# EAGLE board capacitors (EAGLE 9.6.2)
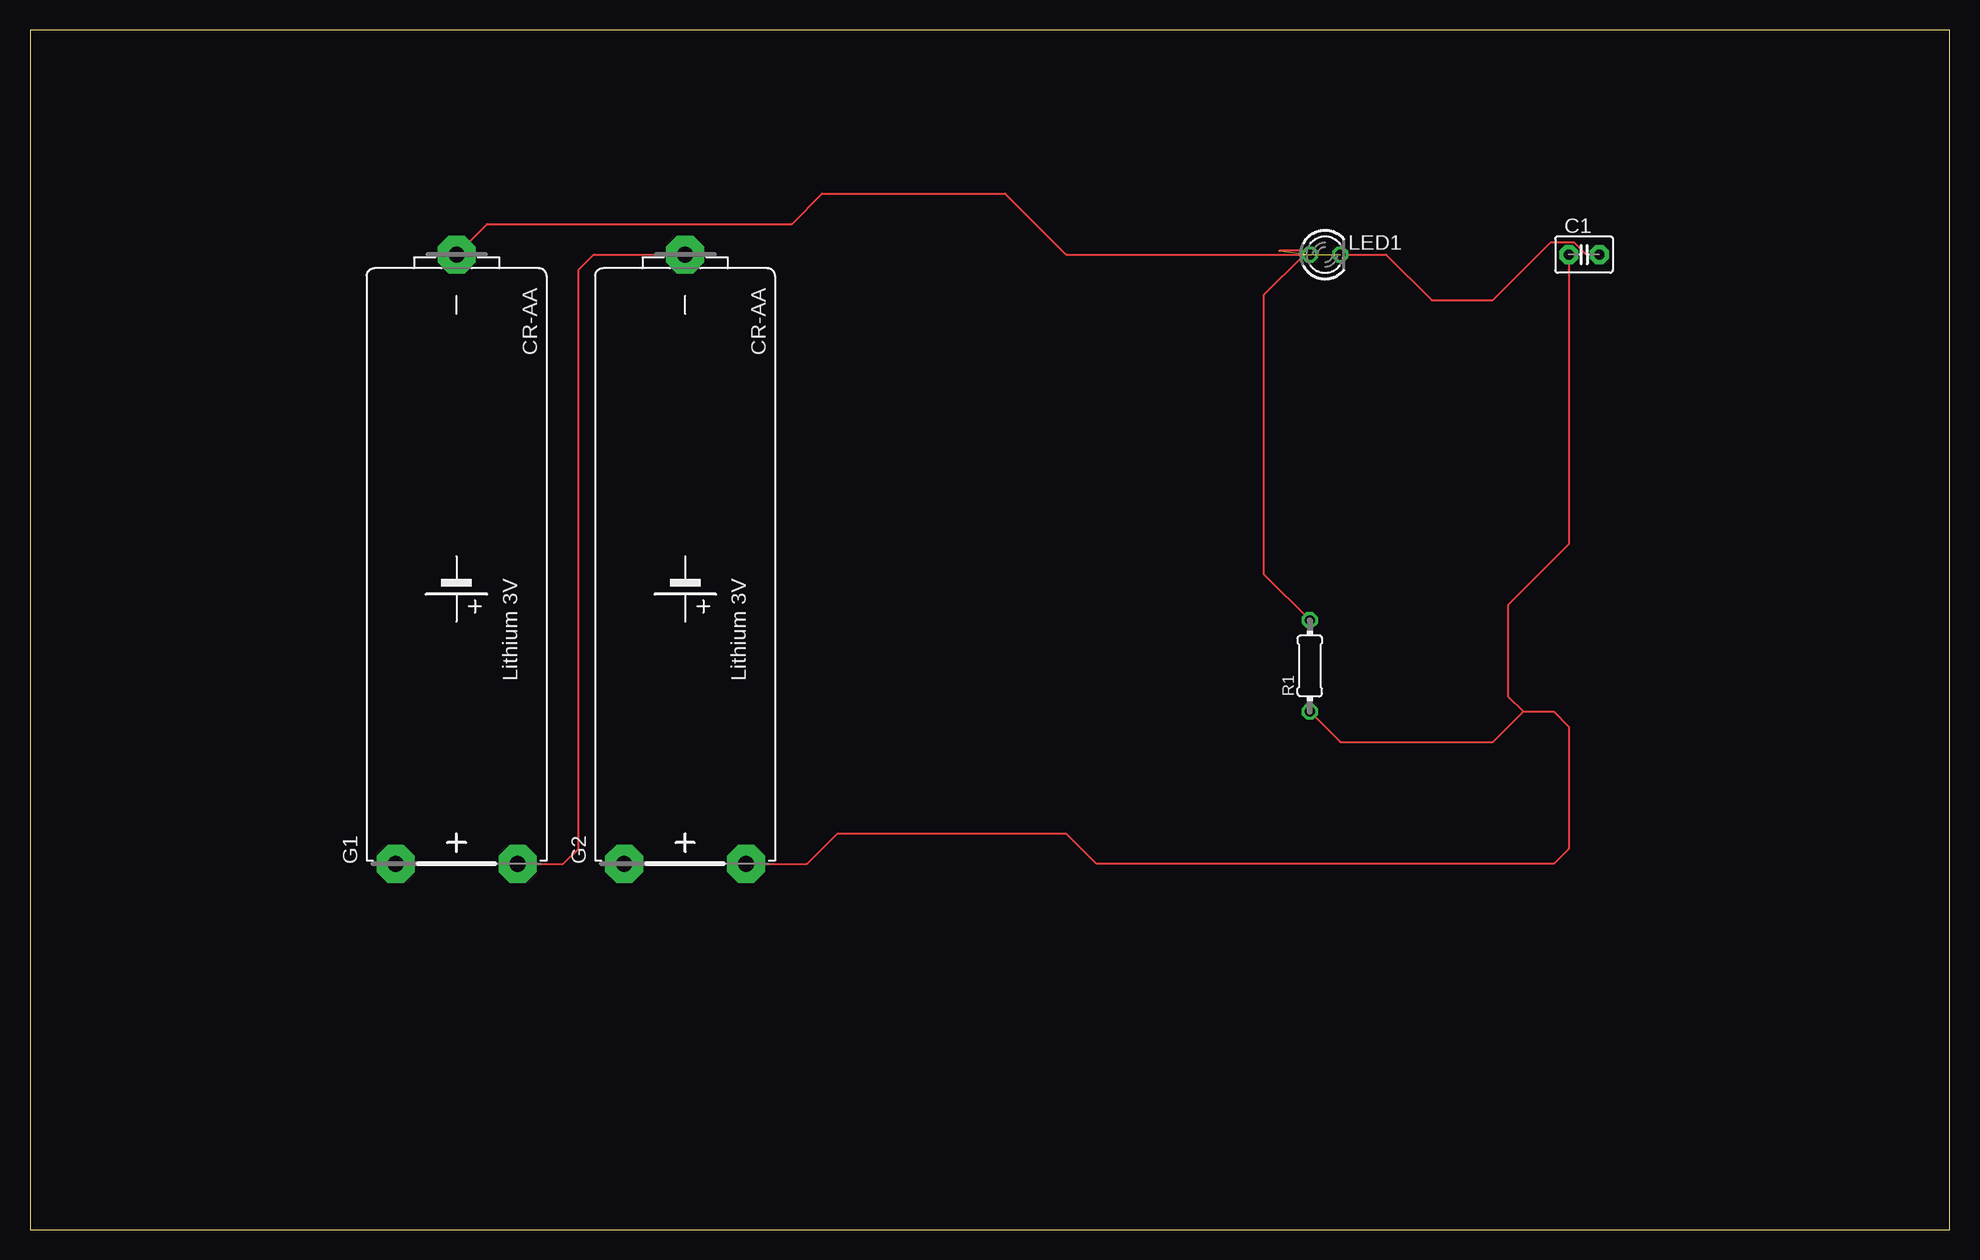
[diagram p0: board, top side]

Size 160 x 100 mm. Coordinates in mm from the lower left corner, seen from the top.
Outline: 0,0 160,0 160,100 0,100 0,0
Copper layers (1*16): Top 0.035mm / dielectric 1.5mm / Bottom 0.035mm
Design rules "default": minimum track width 6mil, minimum drill 0.35mm, track to track 6mil, track to pad 6mil, pad to pad 6mil, via to via 6mil, smd to smd 6mil, copper to edge 40mil, drill to drill 6mil, minimum pad ring 10mil, minimum via ring 8mil, stop-mask expansion 4mil, vias tented up to drill 0mil, thermal gap 10mil

## Footprints (pad centres in the part's own frame; a part is rotated, then mirrored left to right if it is on the bottom)
C2.5-3 = drill 0.813 pad 1.6 octagon: 1 -1.27,0; 2 1.27,0
CRAA = drill 1.321 pad 3.15 octagon: + -25.4,-5.08; +@1 -25.4,5.08; - 25.4,0
LED3MM = drill 0.813 octagon: A -1.27,0; K 1.27,0
0204/7 = drill 0.813 octagon: 1 -3.81,0; 2 3.81,0

## Placement (x,y rotation side)
C1  [C2.5-3]  129.54,81.28 0 top
G1  CR-AA  [CRAA]  35.56,55.88 90 top
G2  CR-AA  [CRAA]  54.61,55.88 90 top
LED1  [LED3MM]  107.95,81.28 0 top
R1  [0204/7]  106.68,46.99 90 top

## Library data of the parts
C1 = capacitor-wima
G1 G2 = battery
LED1 = led
R1 = rcl; SPICEPREFIX: R

## Nets
N$1: C1.1 G2.+ R1.1
N$2: G1.+ G2.-
N$3: C1.2 G1.- LED1.K
N$4: LED1.A R1.2

## Tracks (layer width: path | path; a pad name or v marks a point on that pad's centre or on a via)
N$1
  Top 0.152: G2.+ 64.77,30.48 67.31,33.02 86.36,33.02 88.9,30.48 127,30.48 128.27,31.75 128.27,41.91 127,43.18 124.46,43.18 | C1.1 128.27,57.15 123.19,52.07 123.19,44.45 124.46,43.18 | R1.1 109.22,40.64 121.92,40.64 124.46,43.18
N$2
  Top 0.152: G1.+ 44.45,30.48 45.72,31.75 45.72,80.01 46.99,81.28 G2.-
N$3  (1 unrouted)
  Top 0.152: G1.- 38.1,83.82 63.5,83.82 66.04,86.36 81.28,86.36 86.36,81.28 105.79,81.28 | LED1.K 113.03,81.28 116.84,77.47 121.92,77.47 126.76,82.31 128.7,82.31 129.72,81.28 C1.2
N$4  (1 unrouted)
  Top 0.152: R1.2 102.87,54.61 102.87,77.93 106.1,81.15 106.1,81.41 105.92,81.58 104.14,81.58